# EAGLE board tgam_breakout (EAGLE 6.4)
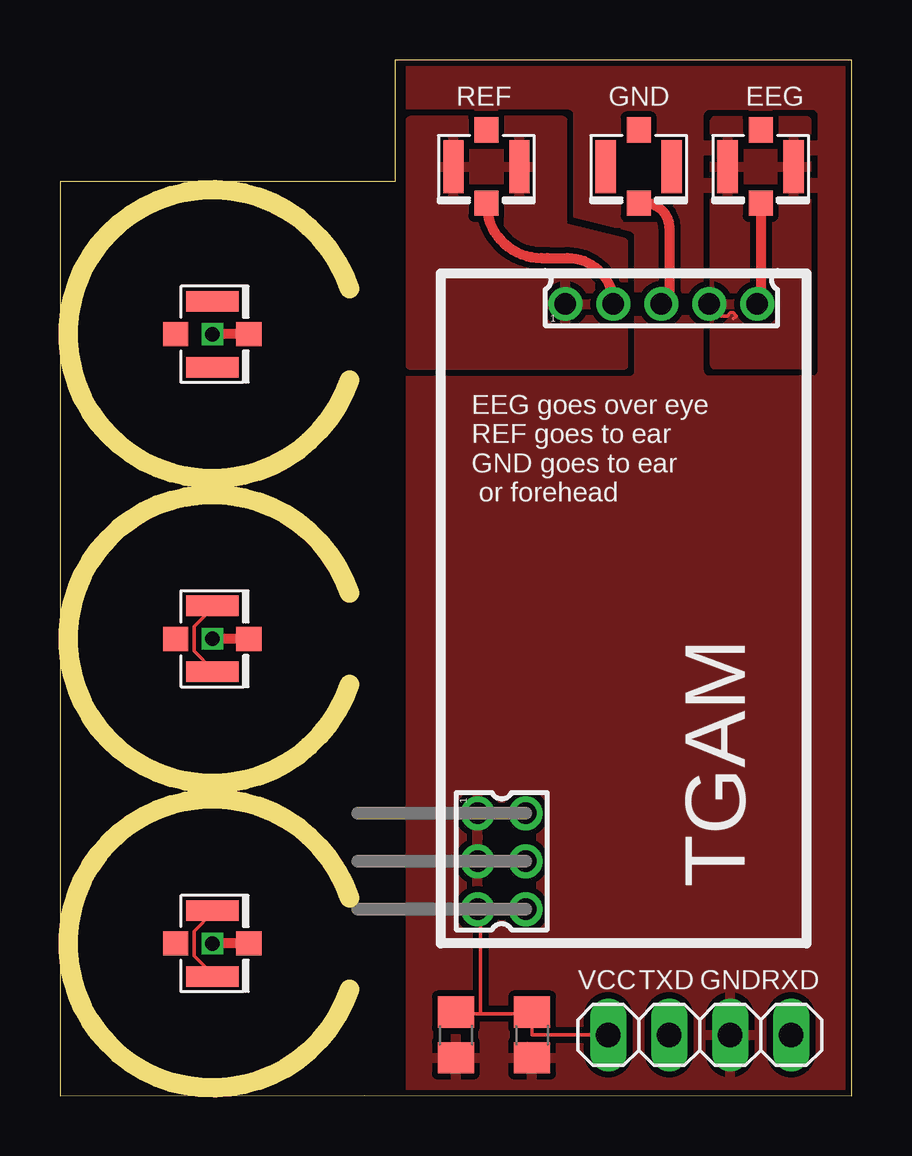
[diagram p0: board, top side]
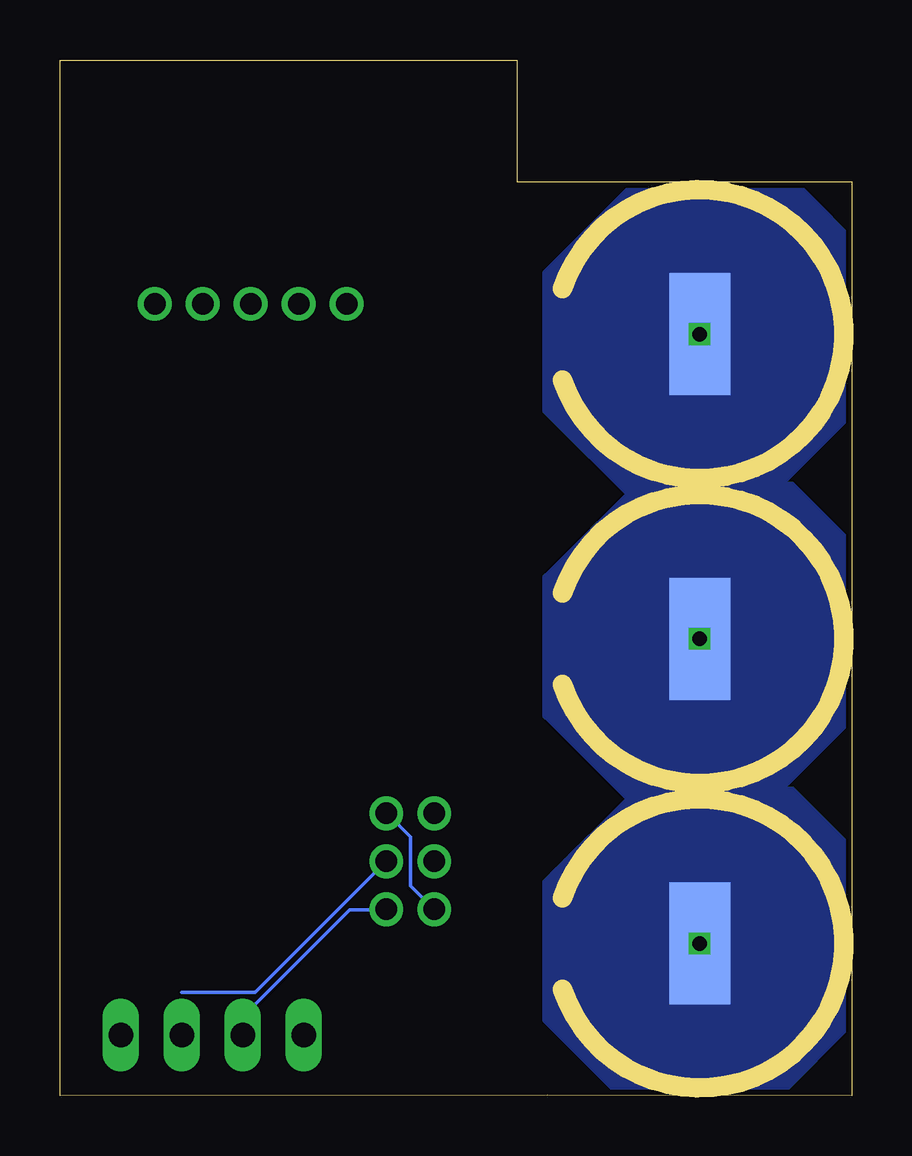
[diagram p1: board, bottom side, seen from below]

Size 33.02 x 43.18 mm. Coordinates in mm from the lower left corner, seen from the top.
Outline: 0,0 12.7,0.02 33.02,0 33.02,43.18 13.97,43.18 13.97,38.1 0,38.1 0,0
Copper layers (1*16): Top 0.035mm / dielectric 1.5mm / Bottom 0.035mm
Design rules "Fusion_eagle_rule_v1.1": minimum track width 6mil, minimum drill 12mil, track to track 6mil, track to pad 6mil, pad to pad 6mil, via to via 6mil, smd to smd 0mil, copper to edge 10mil, drill to drill 10mil, minimum pad ring 10mil, minimum via ring 6mil, stop-mask expansion 2mil, vias tented up to drill 100mil, thermal gap 10mil
Milling: 3 lines

## Footprints (pad centres in the part's own frame; a part is rotated, then mirrored left to right if it is on the bottom)
C0805 = smd 1.3 x 1.5: 1 -0.95,0; 2 0.95,0
U.FL = smd 2.2 x 0.85: P$1 0,1.375; P$2 0,-1.375 | smd 1.05 x 1: P$3 1.525,0; P$4 -1.525,0
1X04 = drill 1.016 long: 1 -3.81,0; 2 -1.27,0; 3 1.27,0; 4 3.81,0
SMD2,54-5,08 = smd 2.54 x 5.08: 1 0,0
332-06 = drill 0.9 pad 1.27: 1 -2,-1; 2 -2,1; 3 0,-1; 4 0,1; 5 2,-1; 6 2,1
2MM5SIL = drill 0.9 pad 1.27: 1 -4,-1; 3 -2,-1; 5 0,-1; 7 2,-1; 9 4,-1

## Placement (x,y rotation side)
C1  4.7uF  [C0805]  16.51,2.54 270 top
C2  0.1uF  [C0805]  19.68,2.54 270 top
EEG  U.FL  [U.FL]  29.21,38.73 270 top
EEG_EL  U.FL  [U.FL]  6.35,19.05 0 top
GND_EL  U.FL  [U.FL]  24.13,38.73 270 top
GND_ELEL  U.FL  [U.FL]  6.35,31.75 0 top
JP1  [1X04]  26.67,2.54 0 top
PAD1  [SMD2,54-5,08]  6.35,19.05 0 bottom
PAD2  [SMD2,54-5,08]  6.35,31.75 0 bottom
PAD3  [SMD2,54-5,08]  6.35,6.35 0 bottom
REF  U.FL  [U.FL]  17.78,38.73 270 top
REF_EL  U.FL  [U.FL]  6.35,6.35 0 top
X1  332-06  [332-06]  18.41,9.78 270 top
X2  332-10  [2MM5SIL]  25.07,34.01 0 top

## Library data of the parts
C1 C2 = rcl
EEG EEG_EL GND_EL GND_ELEL REF REF_EL = SparkFun-Connectors
JP1 = pinhead
PAD1-PAD3 = wirepad
X1 = con-garry
X2 = 2mm

## Nets
EEG: EEG.P$3 X2.9
EEG2: EEG_EL.P$3 PAD1.1
EEG_SHD: EEG.P$1 EEG.P$2 X2.7
EEG_SHD2: EEG_EL.P$1 EEG_EL.P$2
GND: C1.2 C2.2 JP1.3 X1.1 X1.3
GND_EL: GND_EL.P$3 X2.5
GND_EL2: GND_ELEL.P$3 PAD2.1
RDX: JP1.4
REF: REF.P$3 X2.3
REF2: PAD3.1 REF_EL.P$3
REF_SHD: REF.P$1 REF.P$2 X2.1
REF_SHD2: REF_EL.P$1 REF_EL.P$2
RXD: X1.4
TXD: JP1.2 X1.6
VCC: C1.1 C2.1 JP1.1 X1.2 X1.5

## Tracks (layer width: path | path; a pad name or v marks a point on that pad's centre or on a via)
EEG
  Top 0.406: EEG.P$3 29.21,33.01 X2.9
EEG2  (via drill 0.6)
  Top 0.406: EEG_EL.P$3 PAD1.1
  other vias: 6.35,19.05
  pour Bottom (isolate 0.254, no thermals): 2.54,25.4 -0.64,22.23 -0.64,16.51 3.81,12.06 8.89,12.06 12.7,15.88 12.7,21.59 8.89,25.4
EEG_SHD
  Top 0.152: X2.7 27.18,32.89 27.56,32.51 27.81,32.51 27.94,32.64 28.07,32.64 28.19,32.51 28.06,32.4
  pour Top (isolate 0.254): 27.3,30.48 27.3,40.64 31.11,40.64 31.11,30.48
EEG_SHD2
  Top 0.152: EEG_EL.P$2 6.35,17.78 5.59,18.54 5.59,19.56 6.35,20.32 EEG_EL.P$1
GND
  pour Top (isolate 0.254, rank 5): 36.2,43.18 14.61,43.18 14.61,-1.27 36.2,-1.27
GND_EL
  Top 0.406: GND_EL.P$3 24.39,37.21 arc-90 25.4,36.2 25.4,33.34 arc-90 X2.5
GND_EL2  (via drill 0.6)
  Top 0.406: GND_ELEL.P$3 PAD2.1
  other vias: 6.35,31.75
  pour Bottom (isolate 0.254, no thermals): 2.54,38.1 -0.64,34.92 -0.64,29.21 3.81,24.77 8.89,24.77 12.7,28.57 12.7,34.29 8.89,38.1
REF
  Top 0.406: REF.P$3 arc90 20.07,34.92 20.32,34.92 21.16,34.92 arc-90 X2.3
REF2  (via drill 0.6)
  Top 0.406: REF_EL.P$3 PAD3.1
  other vias: 6.35,6.35
  pour Bottom (isolate 0.254, no thermals): 2.54,12.7 -0.64,9.53 -0.64,3.81 3.81,-0.64 8.89,-0.64 12.7,3.17 12.7,8.89 8.89,12.7
REF_SHD
  pour Top (isolate 0.254): 20.95,40.64 14.61,40.64 14.61,30.48 23.5,30.48 23.5,35.56 20.95,36.2
REF_SHD2
  Top 0.152: REF_EL.P$2 6.35,5.08 5.59,5.84 5.59,6.86 6.35,7.62 REF_EL.P$1
RXD
  Bottom 0.152: 27.94,4.32 24.89,4.32 19.43,9.78 X1.4
TXD
  Bottom 0.152: JP1.2 25.4,3.3 20.95,7.75 19.43,7.75 X1.6
VCC
  Top 0.152: 19.68,3.43 17.53,3.43 | 17.53,3.43 16.51,3.43 C1.1 | 19.68,3.43 C2.1 19.68,3.43 | 17.53,3.43 17.53,7.75 X1.5 | JP1.1 19.68,2.54 19.68,3.43
  Bottom 0.152: X1.2 19.3,11.68 18.41,10.79 18.41,8.76 17.53,7.87 X1.5

## Text on the board
tPlace: REF | GND | EEG | EEG goes over eye / REF goes to ear / GND goes to ear / or forehead | TGAM | VCC | TXD | GND | RXD